# EAGLE board usb ir tester (EAGLE 6.1)
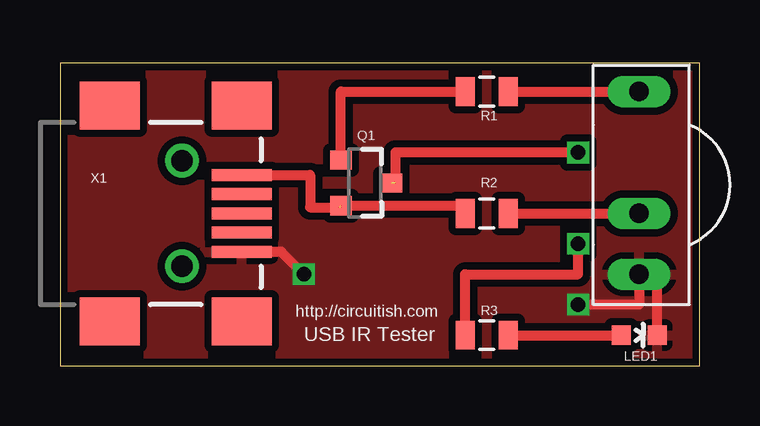
[diagram p0: board, top side]
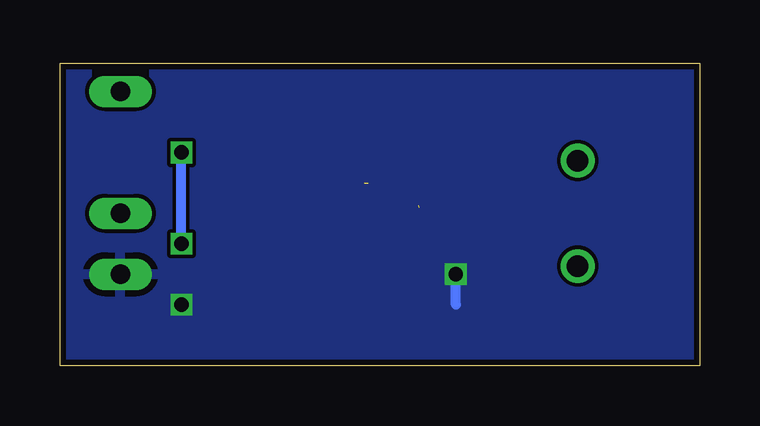
[diagram p1: board, bottom side, seen from below]

Size 26.65 x 12.62 mm. Coordinates in mm from the lower left corner, seen from the top.
Outline: 0,0 26.65,0 26.65,12.62 0,12.62 0,0
Copper layers (1*16): Top 0.035mm / dielectric 1.5mm / Bottom 0.035mm
Design rules: minimum track width 6mil, minimum drill 12mil, track to track 6mil, track to pad 6mil, pad to pad 6mil, via to via 6mil, smd to smd 0mil, copper to edge 10mil, drill to drill 10mil, minimum pad ring 10mil, minimum via ring 6mil, stop-mask expansion 2mil, vias tented up to drill 100mil, thermal gap 10mil

## Footprints (pad centres in the part's own frame; a part is rotated, then mirrored left to right if it is on the bottom)
LED-0603 = smd 0.8 x 0.8: A 0,-0.75; C 0,0.75
SOT23-3 = smd 0.8 x 0.9: 1 -0.95,-1; 2 0.95,-1; 3 0,1.1
0805 = smd 0.8 x 1.2: 1 -0.9,0; 2 0.9,0
TSOP17XX = drill 0.813 long: GND -3.81,0; OUT 3.81,0; V+ -1.27,0
USB-MINIB-NOSTOP = smd 2.5 x 0.5: D+ 2.5,0; D- 2.5,0.8; GND 2.5,-1.6; ID 2.5,-0.8; VBUS 2.5,1.6 | smd 2.5 x 2: G1 -3,-4.5; G2 -3,4.5; G3 2.5,4.5; G4 2.5,-4.5 | drill 0.9 pad 0.8: H1 0,2.2 | drill 0.9 pad 0.787: H2 0,-2.2

## Placement (x,y rotation side)
LED1  [LED-0603]  24.13,1.27 270 top
Q1  BC558  [SOT23-3]  12.7,7.62 270 top
R1  1K  [0805]  17.78,11.43 0 top
R2  33R  [0805]  17.78,6.35 0 top
R3  1K  [0805]  17.78,1.27 0 top
U$1  TSOP1738  [TSOP17XX]  24.13,7.62 90 top
X1  USB Mini  [USB-MINIB-NOSTOP]  5.08,6.35 0 top

## Library data of the parts
LED1 = SparkFun-LED
Q1 = SparkFun-DiscreteSemi
R1-R3 = SparkFun-Passives
U$1 = tsop
X1 = SparkFun-Connectors

## Nets
GND: LED1.C U$1.GND X1.GND
N$1: R1.2 U$1.OUT
N$2: Q1.3 R3.1
N$3: Q1.1 R1.1
N$4: LED1.A R3.2
N$5: R2.2 U$1.V+
VCC: Q1.2 R2.1 X1.VBUS

## Tracks (layer width: path | path; a pad name or v marks a point on that pad's centre or on a via)
GND  (via drill 0.6)
  Top 0.406: LED1.C 24.88,3.81 U$1.GND 24.13,2.54 v21.59,2.54 | v10.16,3.81 9.22,4.75 X1.GND
  Bottom 0.406: 10.16,2.54 v10.16,3.81
  pour Top (isolate 0.305): 0,12.7 26.67,12.7 26.67,0 0,0
  pour Bottom: 0,0 26.67,0 26.67,12.7 0,12.7
N$1
  Top 0.406: R1.2 U$1.OUT
N$2  (via drill 0.6)  (1 unrouted)
  Top 0.406: R3.1 16.88,3.81 21.59,3.81 v21.59,5.08 | v21.59,8.89 13.97,8.89 13.97,7.62
  Bottom 0.406: v21.59,5.08 v21.59,8.89
N$3
  Top 0.406: Q1.1 11.7,11.43 R1.1
N$4
  Top 0.406: R3.2 LED1.A
N$5
  Top 0.406: R2.2 U$1.V+
VCC  (1 unrouted)
  Top 0.406: X1.VBUS 10.42,7.95 10.42,6.6 11.68,6.6 | Q1.2 16.56,6.67 R2.1

## Text on the board
tNames: http://circuitish.com | USB IR Tester